# Altium PCB AltiumSTM32 Barunastra.PcbDoc
Units mm, origin at the board's own origin, x right, y up, seen from the top; angles counter-clockwise.
Board outline 44.25 x 32.25 mm, 4 copper layers (Top Layer, Int1 (GND), Int2 (PWR), Bottom Layer), stack 1.429 mm thick; 35 components, 27 nets, 174 pads, 50 vias.
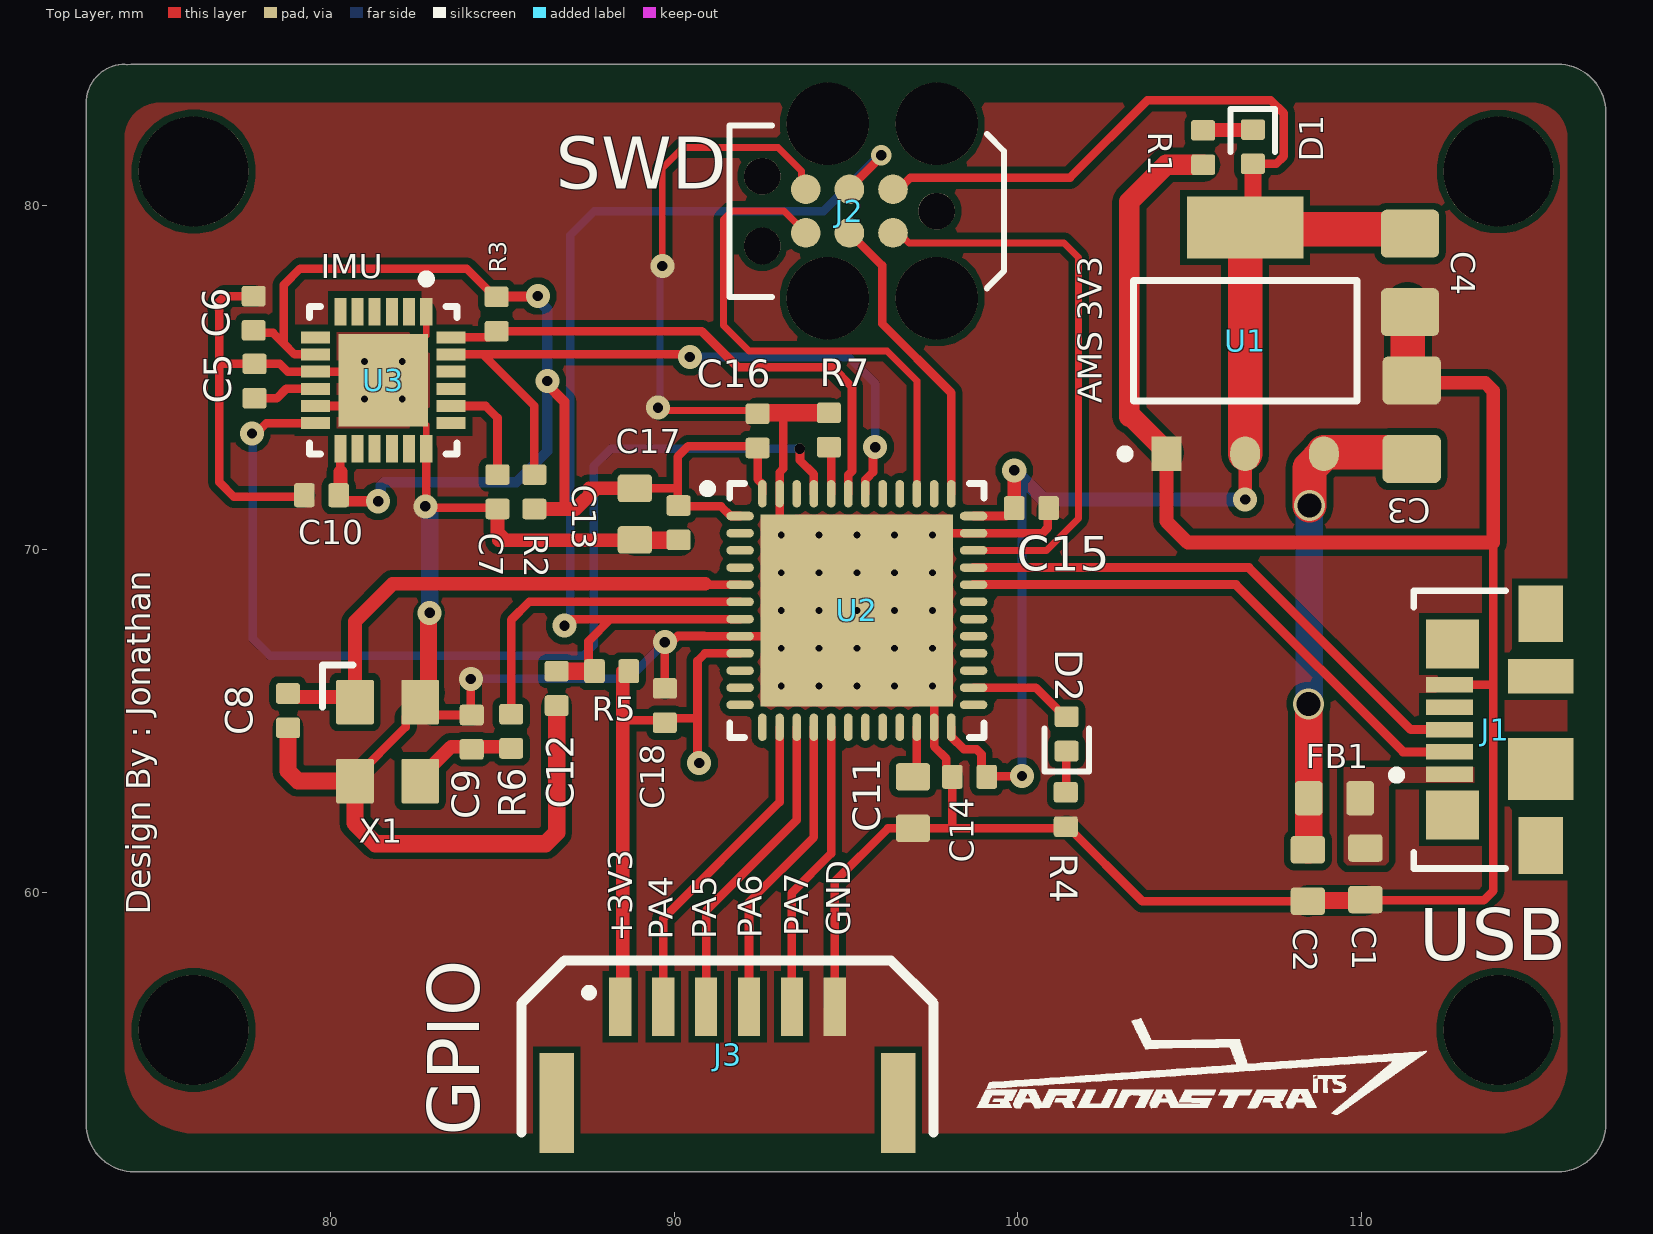
[diagram p0: Top Layer view]
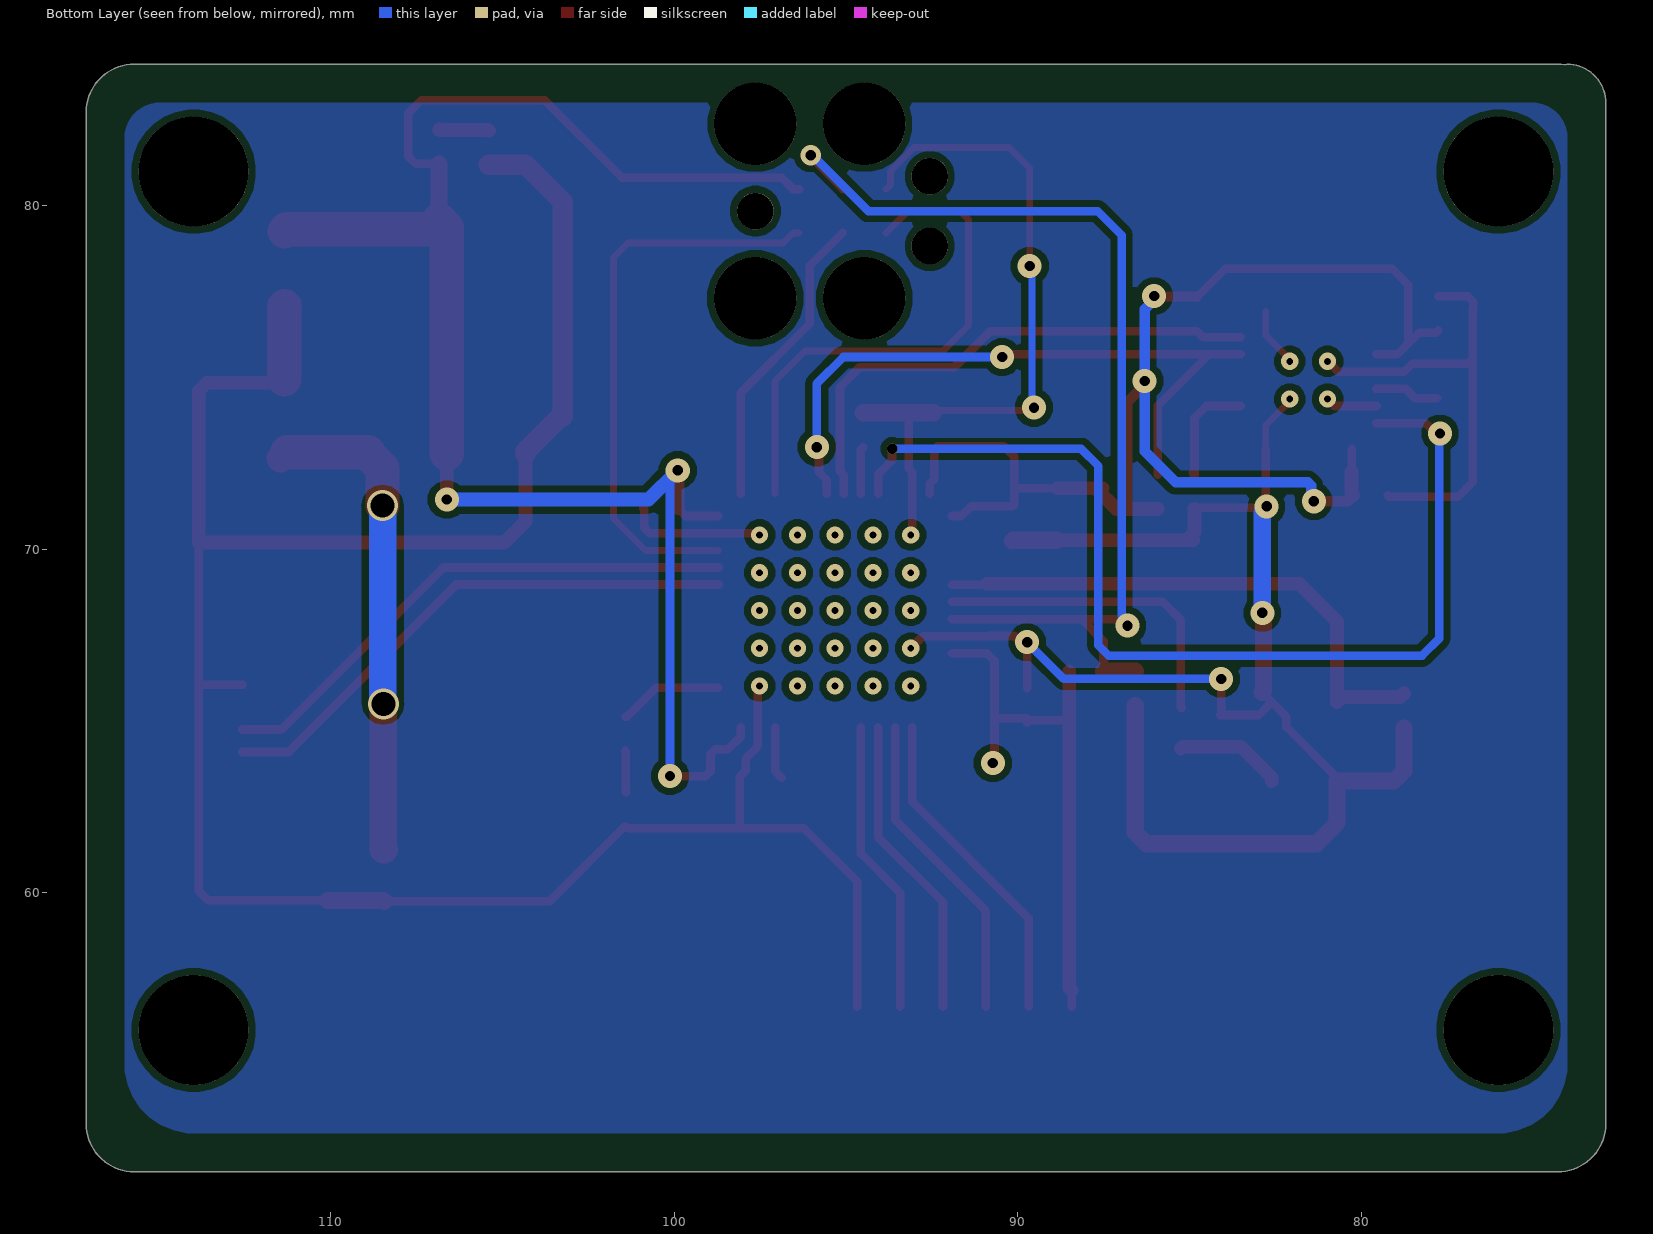
[diagram p1: Bottom Layer view, seen from below]
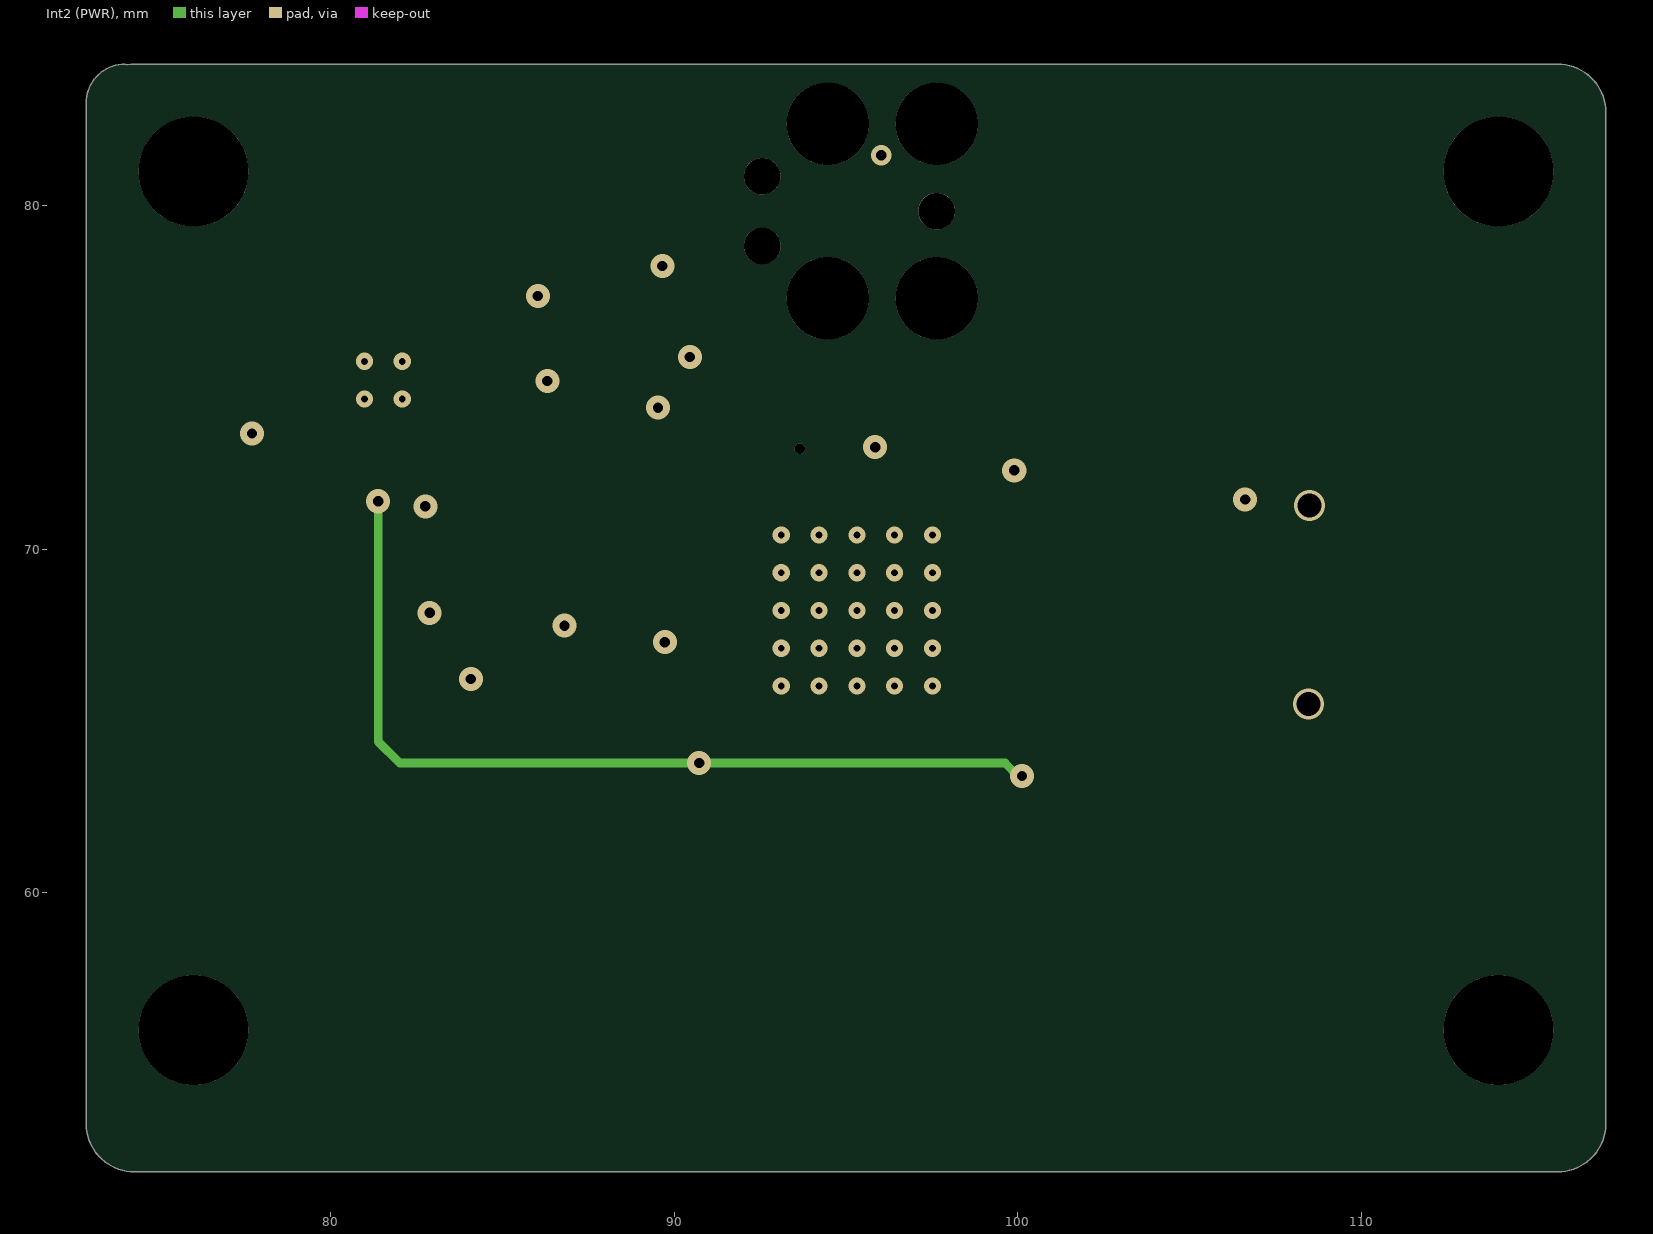
[diagram p2: Int2 (PWR)]
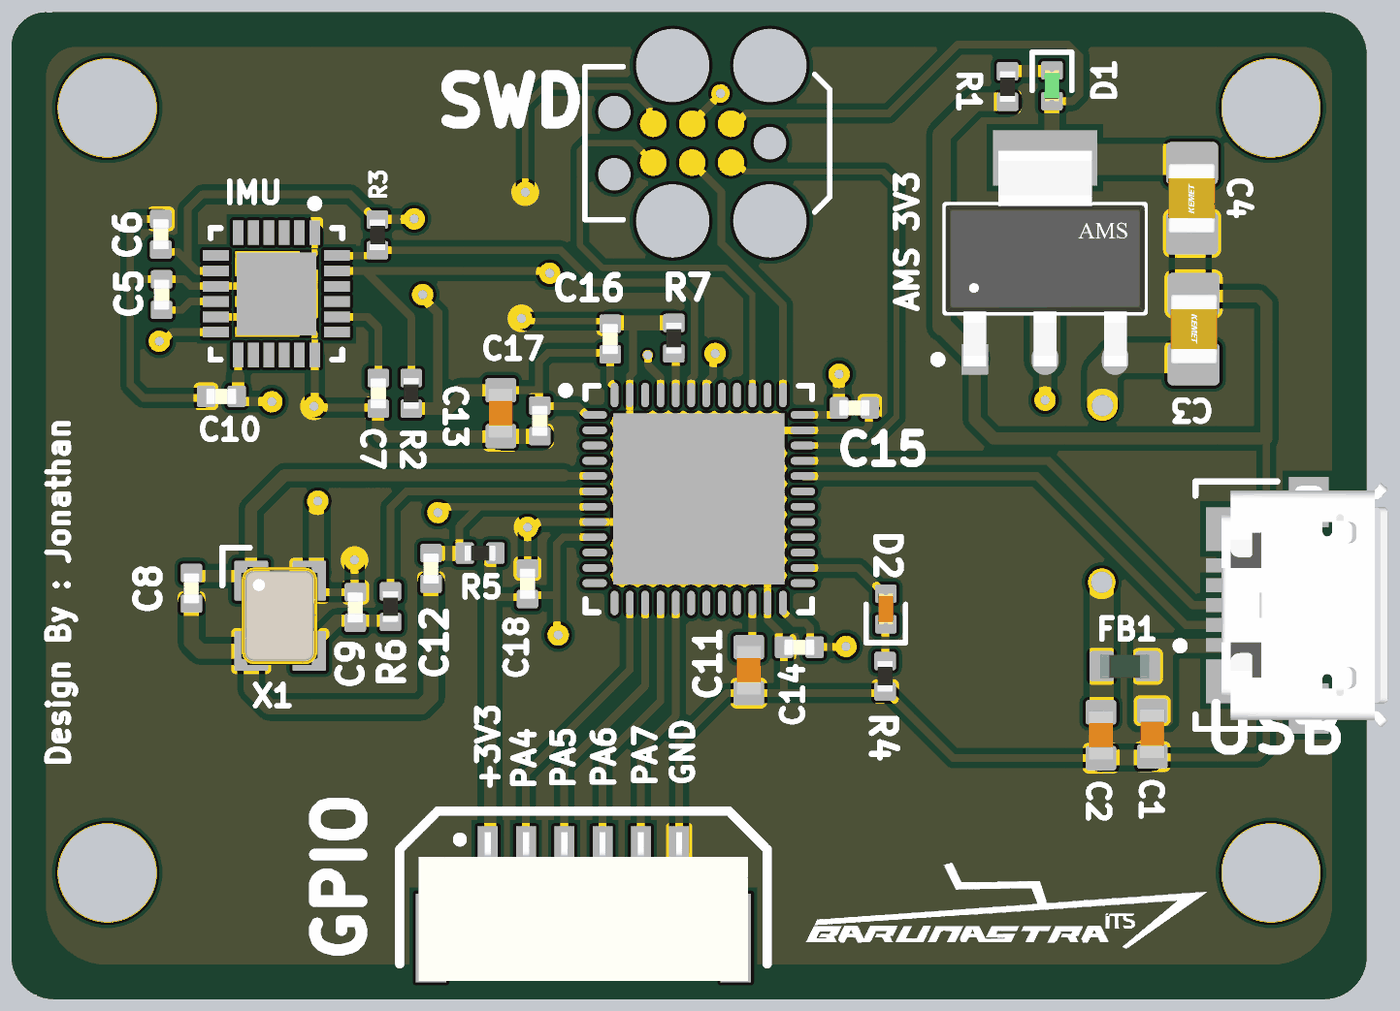
[diagram p3: 3D render of the assembled board from above, using the file's embedded part models]

## Layer stack, top to bottom
Top Solder: solder mask 0.0254, SM-001, Dk 4
Top Layer: signal copper 0.035
Dielectric 2: prepreg 0.1295, PP-017, Dk 4.6
Int1 (GND): signal copper 0.0175
Dielectric 3: core 1.065, Core-039, Dk 4.6
Int2 (PWR): signal copper 0.0175
Dielectric 4: prepreg 0.1295, PP-017, Dk 4.6
Bottom Layer: signal copper 0.035
Bottom Solder: solder mask 0.0254, SM-001, Dk 4

## Board outline
72.873,53.27 72.873,83 cw(c74,83) 74,84.127 74.061,84.112 cw(c74.27,82.73) 74.27,84.127 115.73,84.127 cw(c115.73,82.73) 117.127,82.73 117.127,53.27 cw(c115.73,53.27) 115.73,51.873 74.27,51.873 cw(c74.27,53.27)

## Design rules (kind name [scope] priority, off if disabled: settings)
Clearance [All] p1: gap=0.2 ignorepadtopadclearanceinfootprint=FALSE except(0: Arc-Hole Track-Hole SMDPad-Hole THPad-Hole Via-Hole Fill-Hole Poly-Hole Region-Hole Text-Hole)
DiffPairsRouting [All] p1: maxlimit=0.5 minlimit=0.127 mostfreqgap=0.29 toplayer_mingap=0.203 toplayer_minwidth=0.2 toplayer_maxwidth=0.26 toplayer_prefwidth=0.24 bottomlayer_mingap=0.203 bottomlayer_minwidth=0.2 bottomlayer_maxwidth=0.26 bottomlayer_prefwidth=0.24 impedanceprofiledriven=TRUE impedanceprofileid={2BAE3561-4609-4BBB-B957-19F14050F824} impedanceprofilevalue=90.000000 maxuncoupledlength=12.7
PolygonConnect [All] p1: connectstyle=Direct reliefconductorwidth=0.254 reliefentries=4 polygonreliefangle="90 Angle" airgapwidth=0.254
RoutingVias [All] p1: holewidth=0.3 width=0.7 viastyle="Through Hole" minholewidth=0.25 minwidth=0.55 maxholewidth=0.4 maxwidth=0.9
SolderMaskExpansion [All] p1: expansion=0.102 istentingtop=FALSE
Width [All] p1: maxlimit=1 minlimit=0.2 preferedwidth=0.254 toplayer_prefwidth=0.2 midlayer1_minwidth=0.254 midlayer1_maxwidth=0.254 midlayer2_minwidth=0.254 midlayer2_maxwidth=0.254 bottomlayer_prefwidth=0.2 minimp=50.000000 maximp=50.000000 favimp=50.000000
29 further rules are at their usual default settings.

## Classes and differential pairs
differential pair class DIFF_USB: USB_D
differential pair USB_D: +USB_D_P -USB_D_N

## Components (designator, comment, footprint, x,y, rotation, side; value= is the part's Value field where it differs from the comment)
C1 "2n2" CAP_0603 110.125,60.55 r90 top
C2 "2n2" CAP_0603 108.45,60.5 r90 top
C3 "22uF" CAP_0805 111.475,73.775 r270 top
C4 "22uF" CAP_0805 111.425,78.05 r90 top
C5 "100nF" CAP_0402 77.775,74.9 r270 top
C6 "10nF" CAP_0402 77.75,76.875 r270 top
C7 "2n2" CAP_0402 84.85,71.675 r90 top
C8 "10pF" CAP_0402 78.75,65.3 r90 top
C9 "10pF" CAP_0402 84.1,64.675 r270 top
C10 "100nF" CAP_0402 79.725,71.575 r0 top
C11 "2.2uF" CAP_0603 96.95,62.625 r90 top
C12 "100nF" CAP_0402 86.575,65.95 r90 top
C13 "2n2" CAP_0603 88.85,71.025 r90 top
C14 "100nF" CAP_0402 98.6,63.375 r0 top
C15 "100nF" CAP_0402 100.4,71.2 r180 top
C16 "100nF" CAP_0402 92.425,73.45 r270 top
C17 "100nF" CAP_0402 90.125,70.775 r90 top
C18 "100nF" CAP_0402 89.725,65.45 r270 top
D1 "GREEN" LED_0402_GREEN 106.85,81.725 r90 top
D2 "RED" LED_0402_RED 101.425,64.625 r270 top
FB1 "120R" FB_0603 109.225,62.75 r180 top
J1 "473460001" FP-473460001-MFG 114.885,64.75 r90 top
J2 "TC2030" TC2030-FP 95.1,79.85 r180 top
J3 "SM06B-GHS-TB" SM06B-GHS-TB 91.55,55.275 r0 top
R1 "1K" RES_0402 105.4,81.7 r90 top
R2 "2k2" RES_0402 85.925,71.675 r270 top
R3 "2k2" RES_0402 84.825,76.85 r90 top
R4 "1K" RES_0402 101.4,62.425 r90 top
R5 "10K" RES_0402 88.175,66.45 r0 top
R6 "0R" RES_0402 85.25,64.7 r90 top
R7 "10K" RES_0402 94.5,73.475 r270 top
U1 "AMS1117-3.3" FP-AMS1117-IPC_C 106.625,76.075 r90 top
U2 "STM32F411CEU6" STM-UFQFPN48_L 95.316,68.219 r0 top
U3 "MPU-6050" IS-QFN-24_V 81.525,74.925 r270 top
X1 "24MHz" XTAL_3225 81.65,64.4 r270 top

## Footprints (in the part's own frame and the unit in brackets; to place one, negate y for a bottom-side part, rotate by r counter-clockwise, add the part's x,y. Pads: shape width x height; smd on the part's side, far side on the other; paste and mask are expansions set on the pad)
CAP_0402 [mm]
  rrect25% 0.6x0.7 smd: 1(-0.5,0) 2(0.5,0)
  body extent -0.5,-0.26 0.5,0.26, height 0.37
CAP_0603 [mm]
  rrect25% 0.8x1 smd: 1(-0.75,0) 2(0.75,0)
  body extent -0.8,-0.4 0.8,0.4, height 0.51
CAP_0805 [mm]
  rrect25% 1.4x1.7 smd: 1(-1.143,0) 2(1.143,0)
  body extent -1.15,-0.76 1.15,0.79, height 1.01
FB_0603 [mm]
  rrect25% 0.8x1 smd: 1(-0.75,0) 2(0.75,0)
  body extent -0.8,-0.4 0.8,0.4, height 0.81
FP-473460001-MFG [mm]
  rect 0.45x1.38 smd paste+0 mask+0: 1(-1.3,2.31) 2(-0.65,2.31) 3(0,2.31) 4(0.65,2.31) 5(1.3,2.31)
  rect 1.425x1.55 smd paste+0 mask+0: 6(-2.488,2.225) 7(2.488,2.225)
  rect 1.65x1.3 smd paste+0 mask+0: 8(-3.375,-0.35) 11(3.375,-0.35)
  rect 1.8x1.9 smd paste+0 mask+0: 9(-1.15,-0.35)
  rect 1x1.9 smd paste+0 mask+0: 10(1.55,-0.35)
  silkscreen extent -4.05,0.67 4.05,3.97, body extent -4.3,-2.48 4.3,3.45, height 0.25
FP-AMS1117-IPC_C [mm]
  rect 1.004x0.872 smd paste+0 mask+0: 1(-3.295,2.29)
  rrect100% 1.004x0.872 smd paste+0 mask+0: 2(-3.295,0) 3(-3.295,-2.29)
  rect 1.8x3.4 smd paste+0 mask+0: 4(3.295,0)
  silkscreen extent -3.42,-3.25 1.75,3.62, body extent -3.9,-3.35 3.9,3.35, height 0.25
IS-QFN-24_V [mm] "QFN, 24-Leads, Body 4x4mm, Pitch 0.5mm, Thermal Pad 2.7x2.6mm"
  rect 0.8x0.35 smd: 1(-2,1.25) 2(-2,0.75) 3(-2,0.25) 4(-2,-0.25) 5(-2,-0.75) 6(-2,-1.25) 13(2,-1.25) 14(2,-0.75) 15(2,-0.25) 16(2,0.25) 17(2,0.75) 18(2,1.25)
  rect 0.35x0.85 smd mask+0.102: 7(-1.25,-1.975) 8(-0.75,-1.975) 9(-0.25,-1.975) 10(0.25,-1.975) 11(0.75,-1.975) 12(1.25,-1.975) 19(1.25,1.975) 20(0.75,1.975) 21(0.25,1.975) 22(-0.25,1.975) 23(-0.75,1.975) 24(-1.25,1.975)
  rect 2.7x2.6 smd: 25(0,0)
  silkscreen extent -3.07,-2.15 2.15,2.15, body extent -2,-2 2,2, height 0.95
LED_0402_GREEN [mm]
  rrect25% 0.6x0.7 smd: A(-0.5,0) K(0.5,0)
  silkscreen extent -0.15,-0.65 1.1,0.65, body extent -0.51,-0.25 0.51,0.25, height 0.45
LED_0402_RED [mm]
  rrect25% 0.6x0.7 smd: A(-0.5,0) K(0.5,0)
  silkscreen extent -0.15,-0.65 1.1,0.65, body extent -0.51,-0.25 0.51,0.25, height 0.45
RES_0402 [mm]
  rrect25% 0.6x0.7 smd: 1(-0.5,0) 2(0.5,0)
  body extent -0.5,-0.25 0.5,0.25, height 0.3
SM06B-GHS-TB [mm]
  rect 0.65x1.7 smd: 1(-3.125,1.4) 2(-1.875,1.4) 3(-0.625,1.4) 4(0.625,1.4) 5(1.875,1.4) 6(3.125,1.4)
  rect 1x2.9 smd: ""(-4.975,-1.4) ""(4.975,-1.4)
  silkscreen extent -6,-2.25 6,2.75, body extent -5.38,-2.8 5.38,2.05, height 4.26
STM-UFQFPN48_L [mm] "QFN, 48-Leads, Body 7.1x7.1mm, Pitch 0.5mm, Thermal Pad 5.6x5.6mm, IPC High Density"
  oval 0.8x0.25 smd: 1(-3.4,2.75) 2(-3.4,2.25) 3(-3.4,1.75) 4(-3.4,1.25) 5(-3.4,0.75) 6(-3.4,0.25) 7(-3.4,-0.25) 8(-3.4,-0.75) 9(-3.4,-1.25) 10(-3.4,-1.75) 11(-3.4,-2.25) 12(-3.4,-2.75) 25(3.4,-2.75) 26(3.4,-2.25) 27(3.4,-1.75) 28(3.4,-1.25) 29(3.4,-0.75) 30(3.4,-0.25) 31(3.4,0.25) 32(3.4,0.75) 33(3.4,1.25) 34(3.4,1.75) 35(3.4,2.25) 36(3.4,2.75)
  oval 0.25x0.8 smd: 13(-2.75,-3.4) 14(-2.25,-3.4) 15(-1.75,-3.4) 16(-1.25,-3.4) 17(-0.75,-3.4) 18(-0.25,-3.4) 19(0.25,-3.4) 20(0.75,-3.4) 21(1.25,-3.4) 22(1.75,-3.4) 23(2.25,-3.4) 24(2.75,-3.4) 37(2.75,3.4) 38(2.25,3.4) 39(1.75,3.4) 40(1.25,3.4) 41(0.75,3.4) 42(0.25,3.4) 43(-0.25,3.4) 44(-0.75,3.4) 45(-1.25,3.4) 46(-1.75,3.4) 47(-2.25,3.4) 48(-2.75,3.4)
  rect 5.6x5.6 smd: 49(0,0)
  silkscreen extent -4.47,-3.7 3.7,3.7, body extent -3.55,-3.55 3.55,3.55, height 0.6
TC2030-FP [mm]
  round 0.863 smd paste-0.432: 1(-1.27,-0.635) 2(-1.27,0.635) 3(0,-0.635) 4(0,0.635) 5(1.27,-0.635) 6(1.27,0.635)
  round 2.4 hole 2.4 unplated: MH(-2.54,2.54) MH(-2.54,-2.54) MH(0.635,2.54) MH(0.635,-2.54)
  round 1.067 hole 1.067 unplated: MH(-2.54,0) MH(2.54,-1.016) MH(2.54,1.016)
  silkscreen extent -4.5,-2.5 3.5,2.5
XTAL_3225 [mm]
  rrect10% 1.3x1.1 smd: 1(-1.15,-0.95) 2(1.15,-0.95) 3(1.15,0.95) 4(-1.15,0.95)
  silkscreen extent -2.23,-1.89 -1,-1, body extent -1.6,-1.28 1.6,1.22, height 0.61

## Part data
C1 C2 C11 C13: library part CAP_0603, "Capacitor SMD 0603"
C3 C4: library part CAP_0805, "Capacitor SMD 0805"
C5 C6 C7 C8 C9 C10 C12 C14 C15 C16 C17 C18: library part CAP_0402, "Capacitor SMD 0402"
D1: library part LED_0402_GREEN, "LED 0402 GREEN SMD"
D2: library part LED_0402_RED, "LED 0402 RED SMD"
FB1: library part FB_0603, "Ferrite Bead SMD 0603"
J1: library part CMP-2000-05246-2, "CONN RCPT USB2.0 MICRO B SMD R/A", Current Rating=1.8A, Manufacturer=Molex, Package=0, Temperature="-30°C to +85°C", Temperature Range High=+85°C, Temperature Range Low=-30°C, Voltage Rating=30V, Automotive=No, Category=Conn, ComponentLink2Description=Datasheet, ComponentLink2URL=https://www.molex.com/webdocs/datasheets/pdf/en-us/0473460001_IO_CONNECTORS.pdf, Conn Orientation="Right Angle", Contact Material=Gold,Nickel, Device Class L1=Connectors, Device Class L2="USB Connectors", Device Class L3=unset, Digikey Description="CONN RCPT USB2.0 MICRO B SMD R/A", Footprint Url=https://www.molex.com/pdm_docs/sd/473460001_sd.pdf, Height=2.945mm, Is Female=yes, Lead Free=Yes, Manufacturer Part Number=473460001, Number Of Contacts=5, Octopart=https://octopart.com/47346-0001-molex-7164928, Pitch=0.65mm, RoHS=TRUE, Shielding=true, Usb Standard="USB 2.0"
J2: "Tag-Connect No-Solder SWD Debug Connector DO NOT PLACE", Manufacturer=Tag-Connect, Manufacturer Part Number=TC2030
J3: "Header Connector 6 Position 1.25MM Pitch SMD Horizontal JST GH", Manufacturer=JST, Manufacturer Part Number=SM06B-GHS-TB
R1 R2 R3 R4 R5 R6 R7: library part RES_0402, "Resistor SMD 0402"
U1: library part CMP-209535-000001-1, "LDO Voltage Regulators 1A, 3.3V", Dropout Voltage=1.1V, Manufacturer="Advanced Monolithic Systems", Max Junction Temp=+125°C, Max Power Dissipation=1.2W, Max Supply Voltage=15V, Nominal Supply Current=5mA, Output Current=1A, Output Voltage=3.3V, Package=AMS1117, Temperature="-40°C to +125°C", Temperature Range Low=-40°C, Automotive=No, Category=IC, ComponentLink2Description=Datasheet, ComponentLink2URL=http://www.advanced-monolithic.com/pdf/ds1117.pdf, Device Class L1="Integrated Circuits (ICs)", Device Class L2="Power Management ICs", Device Class L3="Voltage Regulators - Linear", Height=1.8mm, Ipc Land Pattern Name=SOT229P700X180-4, Lead Free=Yes, Manufacturer Part Number=AMS1117-3.3, Number Of Outputs=1, Octopart=https://octopart.com/ams1117-3.3-advanced+monolithic+systems-25899300, Output Type=Fixed, RoHS=TRUE, Standoff Height=0.64mm, Temperature Range High=+125°C
U2: library part CMP-0243-00165-1, "ARM Cortex-M4 32-bit MCU+FPU, 512 KB Flash, 128 KB RAM, 36 I/Os, 48-Pin UFQFPN, -40 to 85 degC, Tray", I/Os (High Current)=36, Operating Frequency(F) (Processor speed) (MHz)=100, Package Description=UFQFPN48, Package Reference="48-Pin Ultra Thin Fine Pitch Quad Flat No-Lead, 7 x 7 x 0.6 mm Body, 0.5 mm Pitch, Exposed Pad", Supply Voltage(Vcc) min (V)=1.7, ComponentLink1Description="Manufacturer URL", ComponentLink1URL=http://www.st.com/, ComponentLink2Description=Datasheet, ComponentLink2URL=http://www.st.com/st-web-ui/static/active/en/resource/technical/document/datasheet/DM00115249.pdf, Core="ARM Cortex-M4", DatasheetVersion="Rev. 6", FLASH Size (Prog) (kB)=512, Internal RAM Size (kB)=128, Mounting Technology="Surface Mount", Packing=Tray
U3: library part CMP-1753-00002-2, "3-Axis Gyroscope, Accelerometer and a Digital Motion Processor(TM) (DMP), 2.375 to 3.46 V, -40 to 85 degC, 24-Pin QFN, RoHS, Tape and Reel", Manufacturer=InvenSense, Standard Package=5,000, Category=Sensors,Transducers, Datasheet URL=http://datasheet.octopart.com/MPU-6050-InvenSense-datasheet-14421344.pdf, Datasheet Version="Rev. 3.3, 05/2012", Dynamic Catalog=MPU-6000™Series, Family=Multifunction, Featured Product=MPU-60506-Axis,IntegratedI²CSolution, Manufacturer URL=http://www.invensense.com/, Online Catalog=MPU-6000™Series, Other Names="1428-1007-2 / MPU6050", Output Type=Digital, Sensor Type=MotionTracking, Unit PriceUSD=Digital
X1: library part TSX-3225_24.0000MF15X-AC, "Crystal SMD 24MHz 10PPM 7pF 3225", Manufacturer=Epson, Manufacturer Part Number="TSX-3225 24.0000MF15X-AC"

## Free pads (board coordinates)
  round 3.2 hole 3.2: 1(76,81) 2(114,81) 3(114,56) 4(76,56)

## Via types
v1: diameter 0.5, hole 0.2, Top Layer to Bottom Layer, 29 vias
v2: diameter 0.7, hole 0.3, Top Layer to Bottom Layer, 17 vias
v3: diameter 0.9, hole 0.7, Top Layer to Bottom Layer, 2 vias
v4: diameter 0.3, hole 0.3, Top Layer to Bottom Layer, 1 vias
v5: diameter 0.6, hole 0.3, Top Layer to Bottom Layer, 1 vias

## Nets (pads, with @x,y where several pads share a name; then routed paths per layer and width w, separated by ;. In a path a pad name is that pad's centre, name@x,y a point inside that pad or via, vN(x,y) a via of type N, cw(c..) or ccw(c..) an arc to the next point about the centre after c; other vN are vias at no path point)
+3V3: C4.2 C6.2 C10.2 C13.2 C14.2 C15.2 C16.2 C17.2 C18.2 D1.A J2.1 J3.1 R2.2 R3.2 R5.2 U1.2 U1.4 U2.1 U2.9 U2.24 U2.36 U2.48 U3.8 U3.13 | length 134
  Top Layer w0.25: C6.2 77.823,76.302 78.313,76.302 78.625,75.99 ; U3.8 78.94,75.675 78.625,75.99 ; 80.275,72.25 U3.13 ; R3.2@84.775,77.35 83.95,78.175 79.1,78.175 78.625,77.7 78.625,75.99 ; J3.1 J3.1@88.425,57.15 ; 88.5,65.175 88.657,65.018 89.657,65.018 C18.2 ; C13.2 90.1,71.775 ; C18.2@89.725,65.076 90.529,65.076 ; v2@90.675,63.825 90.675,66.75 90.894,66.969 U2.9 ; U2.1 91.641,70.969 91.36,71.25 90.15,71.25 90.1,71.3 90.1,71.775 ; U2.48 92.566,71.894 92.425,72.035 92.425,72.9 92.325,73 90.4,73 90.1,72.7 90.1,71.775 ; J2.1 96.536,80.485 96.876,80.825 101.525,80.825 103.775,83.075 107.375,83.075 107.75,82.7 107.75,81.45 107.525,81.225 D1.A ; U2.24 98.066,64.544 98.435,64.175 98.8,64.175 98.946,64.029 98.946,63.529 C14.2 99.113,63.387 100.112,63.387 v2(100.125,63.4) ; U2.36 99.669,70.969 C15.2
  Top Layer w0.3: C10.2 80.225,71.55 80.375,71.4 v2(81.375,71.4) ; R3.2@84.775,77.35 84.787,77.362 86.013,77.362 v2(86.025,77.375) ; v2(86.3,74.9) 86.3,74.8 86.8,74.3 86.8,71.175 ; v2@90.675,63.825 v2(90.725,63.775)
  Top Layer w0.4: C10.2 80.275,71.625 80.275,72.25 ; R2.2 86.8,71.175 87.125,71.175 87.725,71.775 ; 87.525,71.775 87.725,71.775 ; J3.1@88.425,57.15 88.5,57.225 88.5,65.175 R5.2@88.5,66.45 ; C13.2 87.725,71.775 ; C15.2 v2(99.9,72.3) ; v2(106.625,71.45) 106.625,71.5 U1.2
  Top Layer w0.5: U1.4@106.85,79.595 D1.A
  Top Layer w1: U1.2 U1.4 ; U1.4@106.85,79.595 U1.4 ; C4.2@111.35,79.268 111.299,79.319 106.676,79.319 U1.4
  Int2 (PWR) w0.254: v2(81.375,71.4) 81.375,64.4 82,63.775 v2(90.725,63.775) 99.629,63.775 100.004,63.4 v2(100.125,63.4)
  Bottom Layer w0.25: v2(99.9,72.3) 99.9,72.178 100.125,71.953 v2(100.125,63.4)
  Bottom Layer w0.3: v2(81.375,71.4) 81.452,71.477 81.452,71.851 81.551,71.95 85.4,71.95 86.3,72.85 v2(86.3,74.9) 86.3,76.992 86.025,77.267 v2(86.025,77.375)
  Bottom Layer w0.4: v2(99.9,72.3) 100.75,71.45 v2(106.625,71.45)
+5: C2.2 C3.2 FB1.2 U1.3 | length 14.4
  Top Layer w0.8: C2.2 108.475,61.25 v3(108.475,65.5) ; C3.2@111.28,72.827 C3.2
  Top Layer w1: v3(108.5,71.275) 108.5,72.365 U1.3 ; U1.3@108.915,72.827 C3.2@111.28,72.827
  Bottom Layer w0.8: v3(108.475,65.5) 108.487,65.513 108.487,71.263 v3(108.5,71.275)
GND: C1.1 C2.1 C3.1 C4.1 C5.1 C6.1 C7.1 C8.1 C9.1 C10.1 C11.1 C12.1 C13.1 C14.1 C15.1 C16.1 C17.1 C18.1 J1.5 J2.5 J3.6 R1.1 R4.1 R7.1 U1.1 U2.8 U2.23 U2.35 U2.47 U2.49 U3.1 U3.9 U3.11 U3.18 U3.25 X1.2 X1.4 | length 161.6
  Top Layer w0.2: v1(82.075,74.375) 82.075,74.325 82.775,73.625 U3.18 ; v1(82.075,75.475) 82.075,75.525 82.775,76.225 U3.1 ; v2(89.525,74.125) 89.613,74.037 92.337,74.037 C16.1 ; v2(89.65,78.25) 89.65,81.1 90.25,81.7 93.026,81.7 93.703,81.022 93.703,80.612 J2.5
  Top Layer w0.25: C6.1 76.9,77.375 76.729,77.204 76.729,76.996 76.75,76.975 76.75,75.546 ; C10.1 79.175,71.525 77.175,71.525 76.75,71.95 76.75,75.546 ; U3.11 80.775,74.175 v1(80.975,74.375) ; X1.2 80.7,63.35 82.175,64.825 82.175,65.125 X1.4 ; v1(80.975,75.475) 80.675,75.175 U3.9 78.738,75.175 78.513,75.4 C5.1 76.896,75.4 76.75,75.546 ; U3.18 82.775,71.275 v2(82.75,71.25) 82.788,71.212 84.813,71.212 C7.1 ; X1.4@82.875,65.825 X1.4 ; C9.1@84.075,65.35 v2(84.075,66.225) ; C9.1 82.975,65.175 X1.4 ; C18.1 v2@89.725,67.1 ; v2(89.725,67.294) 89.906,67.294 89.912,67.288 90.1,67.475 90.867,67.475 90.873,67.469 U2.8 92.766,67.469 v1(93.116,67.119) ; v1(93.116,70.419) 93.066,70.469 U2.47 93.066,72.241 93.175,72.35 93.175,73.975 ; J3.6 94.675,60.325 96.221,61.871 96.946,61.871 C11.1 98.1,61.875 ; v1(97.516,66.019) 97.566,65.969 U2.23 97.566,64.259 97.925,63.9 97.925,63.55 C14.1 98.1,61.875 ; v1(97.516,70.419) 97.566,70.469 U2.35 100.719,70.469 100.875,70.625 100.875,71.175 C15.1 ; C2.1 103.625,59.75 101.45,61.925 R4.1 101.35,61.875 98.85,61.875 98.1,61.875 ; C1.1@110.1,59.775 113.575,59.775 113.85,60.05 113.85,66.05 ; J1.5 113.85,66.05 ; 113.85,70.05 113.85,66.05
  Top Layer w0.4: C7.1 84.85,70.497 85.084,70.262 ; 84.884,70.262 85.084,70.262 ; C13.1@88.863,70.262 85.084,70.262 ; U1.1 104.335,70.815 104.95,70.2 113.85,70.2 113.85,74.616 113.616,74.85 C3.1@111.501,74.85
  Top Layer w0.5: C8.1 78.75,63.543 79.043,63.25 X1.2 80.7,62.025 81.3,61.425 86.25,61.425 86.575,61.75 C12.1 ; X1.4@82.875,65.825 82.837,65.863 82.837,68.112 v2(82.875,68.15) ; C13.1@88.863,70.262 90.138,70.262 C17.1@90.15,70.25 ; C16.1@92.45,73.975 93.175,73.975 R7.1 ; C2.1 108.475,59.775 C1.1@110.1,59.775
  Top Layer w0.6: U1.1 104.335,72.846 103.316,73.865 103.25,73.865 103.25,80.124 104.326,81.2 R1.1
  Top Layer w1: C4.1@111.35,77.082 C4.1@111.362,77.07 ; C3.1@111.362,74.948 C4.1@111.362,76.97
  Bottom Layer w0.2: v2(89.525,74.125) 89.588,74.188 89.588,78.188 v2(89.65,78.25)
  Bottom Layer w0.25: v2(82.75,71.25) v2@82.813,71.187 ; v2(84.075,66.225) 88.656,66.225 v2(89.725,67.294)
  Bottom Layer w0.5: v2@82.813,71.187 82.788,71.163 82.788,71.158 82.875,71.071 v2(82.875,68.15)
  other v1: 93.116,66.019 94.216,66.019 95.316,66.019 96.416,66.019 94.216,67.119 95.316,67.119 96.416,67.119 97.516,67.119 93.116,68.219 94.216,68.219 95.316,68.219 96.416,68.219 97.516,68.219 93.116,69.319 94.216,69.319 95.316,69.319 96.416,69.319 97.516,69.319 94.216,70.419 95.316,70.419 96.416,70.419
IMU_CPOUT: C7.2 U3.20 | length 3.2
  Top Layer w0.25: U3.20 84.5,74.175 84.85,73.825 C7.2@84.85,72.2 ; C7.2 C7.2@84.9,72.225
IMU_INT: U2.45 U3.12 | length 31.1
  Top Layer w0.25: v2(77.7,73.375) 77.822,73.375 78.122,73.675 U3.12 ; v4(93.65,72.925) 93.66,72.915 93.66,72.59 94.066,72.184 U2.45
  Bottom Layer w0.25: v2(77.7,73.375) 77.725,73.35 77.725,67.4 78.221,66.904 87.354,66.904 87.65,67.2 87.65,72.425 88.15,72.925 v4(93.65,72.925)
IMU_REGOUT: C5.2 U3.10 | length 1.9
  Top Layer w0.25: C5.2 78.425,74.4 78.7,74.675 U3.10
IMU_SCL: R2.1 U2.42 U3.23 | length 20.1
  Top Layer w0.25: U3.23 84.425,75.675 ; R2.1 85.925,74.175 84.425,75.675 ; v2(90.45,75.6) 90.375,75.675 84.425,75.675 ; U2.42 95.566,72.03 95.616,72.08 95.786,72.25 95.786,72.911 v2(95.85,72.975)
  Bottom Layer w0.25: v2(90.45,75.6) 95.075,75.6 95.85,74.825 v2(95.85,72.975)
IMU_SDA: R3.1 U2.43 U3.24 | length 15.6
  Top Layer w0.25: U3.24 84.6,76.175 84.775,76.35 R3.1 90.8,76.35 91.85,75.3 94.6,75.3 95.175,74.725 95.175,72.275 95.066,72.166 U2.43
LED_PWR_K: D1.K R1.2 | length 1.5
  Top Layer w0.4: R1.2 105.412,82.213 106.837,82.213 D1.K
MCU_BOOT0: R7.2 U2.44 | length 1.4
  Top Layer w0.25: R7.2 94.566,72.909 U2.44
MCU_LED_A: D2.A U2.26 | length 3.1
  Top Layer w0.25: U2.26 100.531,65.969 101.375,65.125 D2.A
MCU_LED_K: D2.K R4.2 | length 1.2
  Top Layer w0.25: R4.2 101.412,62.938 101.412,64.112 D2.K
MCU_NRST: C12.2 J2.3 R5.1 U2.7 | length 30.8
  Top Layer w0.25: v2(86.8,67.775) 86.8,67.823 86.946,67.969 88.144,67.969 ; R5.1@87.5,66.45 87.5,67.325 88.144,67.969 ; U2.7 88.144,67.969 ; J2.3 95.1,80.517 96.025,81.442 v5(96.025,81.475)
  Top Layer w0.5: C12.2 R5.1@87.5,66.45
  Bottom Layer w0.25: v2(86.8,67.775) 86.8,67.897 86.975,68.072 86.975,79.15 87.675,79.85 94.35,79.85 95.975,81.475 v5(96.025,81.475)
MCU_OSC_IN: C8.2 U2.5 X1.1 | length 16.1
  Top Layer w0.25: 90.9,68.994 90.925,68.969 U2.5
  Top Layer w0.4: C8.2 78.85,65.7 80.55,65.7 X1.1 80.7,65.7 80.7,67.9 81.794,68.994 90.9,68.994
MCU_OSC_OUT: R6.2 U2.6 | length 9.5
  Top Layer w0.25: R6.2@85.225,65.375 85.25,65.4 85.25,67.95 85.769,68.469 U2.6
MCU_PA4: J3.2 U2.14 | length 9.5
  Top Layer w0.25: J3.2 89.675,59.25 93.066,62.641 U2.14
MCU_PA5: J3.3 U2.15 | length 9.2
  Top Layer w0.25: J3.3 90.925,59.475 93.566,62.116 U2.15
MCU_PA6: J3.4 U2.16 | length 8.9
  Top Layer w0.25: J3.4 92.175,59.725 94.066,61.616 U2.16
MCU_PA7: J3.5 U2.17 | length 8.6
  Top Layer w0.25: J3.5 93.425,60 94.566,61.141 U2.17
MCU_SWCLK: J2.4 U2.37 | length 8.8
  Top Layer w0.25: J2.4 96.05,78.265 96.05,76.575 98.066,74.559 U2.37
MCU_SWDIO: J2.2 U2.34 | length 16.7
  Top Layer w0.2: J2.2 96.549,79.215 96.839,78.925 101.35,78.925 101.775,78.5 101.775,70.9 100.844,69.969 U2.34
MCU_SWO: J2.6 U2.39 | length 15.4
  Top Layer w0.2: J2.6 93.195,79.85 91.675,79.85 91.433,79.608 91.433,76.517 92.175,75.775 96.2,75.775 97.066,74.909 U2.39
MCU_VCAP1: C11.2 U2.22 | length 1.5
  Top Layer w0.25: C11.2@96.875,63.35 97.066,63.541 U2.22
USB_D_N: J1.2 U2.32 | length 15.9
  Top Layer w0.26: U2.32 106.356,68.969 111.225,64.1 J1.2
USB_D_P: J1.3 U2.33 | length 15.8
  Top Layer w0.26: U2.33 106.731,69.469 111.45,64.75 J1.3
VBUS: C1.2 FB1.1 J1.1
XTAL_IN: C9.2 R6.1 X1.3 | length 3.1
  Top Layer w0.4: X1.3 82.6,63.35 83.5,64.25 85.2,64.25 R6.1
pads on no net: J1.4 J1.6 J1.7 J1.8 J1.9 J1.10 J1.11 J2.MH J3. U2.2 U2.3 U2.4 U2.10 U2.11 U2.12 U2.13 U2.18 U2.19 U2.20 U2.21 U2.25 U2.27 U2.28 U2.29 U2.30 U2.31 U2.38 U2.40 U2.41 U2.46 U3.2 U3.3 U3.4 U3.5 U3.6 U3.7 U3.14 U3.15 U3.16 U3.17 U3.19 U3.21 U3.22

## Polygon pours and split planes (outlines as drawn)
GND on Top Layer "GND_L01_P001" (solid, pour order 1): 115,83 cw(c115,82) 116,82 116,55 cw(c114,55) 114,53 76,53 cw(c76,55) 74,55 74,82 cw(c75,82) 75,83
VBUS on Top Layer "VBUS_L01_P000" (solid, pour order 0): 113.3,63.65 109.5,63.65 109.5,60.9 109.6,60.8 110.7,60.8 110.8,60.9 110.8,63.1 110.9,63.2 113.3,63.2
+5 on Bottom Layer "+5_L04_P003" (solid, pour order 3): 115,83 cw(c115,82) 116,82 116,55 cw(c114,55) 114,53 76,53 cw(c76,55) 74,55 74,82 cw(c75,82) 75,83

## Silkscreen, mask and mechanical layers (free items; w line width, h text height)
Top Overlay:
  drawing of 10 lines, arcs and shapes, not listed
  text "SWD" at 86.55,80.5 h1.52
  text "IMU" at 79.7,77.9 h0.7
  text "AMS 3V3" at 102.45,74.25 h0.7 r90
  text "Design By : Jonathan" at 74.742,59.35 h0.7 r90
  text "GND" at 95.125,58.75 h0.7 r90
  text "PA7" at 93.9,58.725 h0.7 r90
  text "PA6" at 92.55,58.675 h0.7 r90
  text "PA5" at 91.225,58.65 h0.7 r90
  text "PA4" at 89.95,58.625 h0.7 r90
  text "+3V3" at 88.775,58.575 h0.7 r90
  text "USB" at 111.7,58.025 h1.52
  text "GPIO" at 84.325,52.925 h1.52 r90
Mechanical 1:
  lines w0.254: 73,82.73 cw(c74.27,82.73) 74.27,84 115.73,84 cw(c115.73,82.73) 117,82.73 117,53.27 cw(c115.73,53.27) 115.73,52 74.27,52 cw(c74.27,53.27) 73,53.27 73,82 73,83 cw(c74,83) 74,84

## Text inside footprints (layer, text, board x,y; h text height)
D1: Mechanical 13 "+" at 106.342,79.842 h0.5 r90
D2: Mechanical 13 "+" at 101.933,66.508 h0.5 r270